# Altium PCB Node_Hub.PcbDoc
Units mil, origin at the board's own origin, x right, y up, seen from the top; angles counter-clockwise.
Board outline 4280 x 4715 mil, 2 copper layers (Top Layer, Bottom Layer); 17 components, 14 nets, 127 pads, 0 vias.
Unrouted connection lines stored in the file: 1.
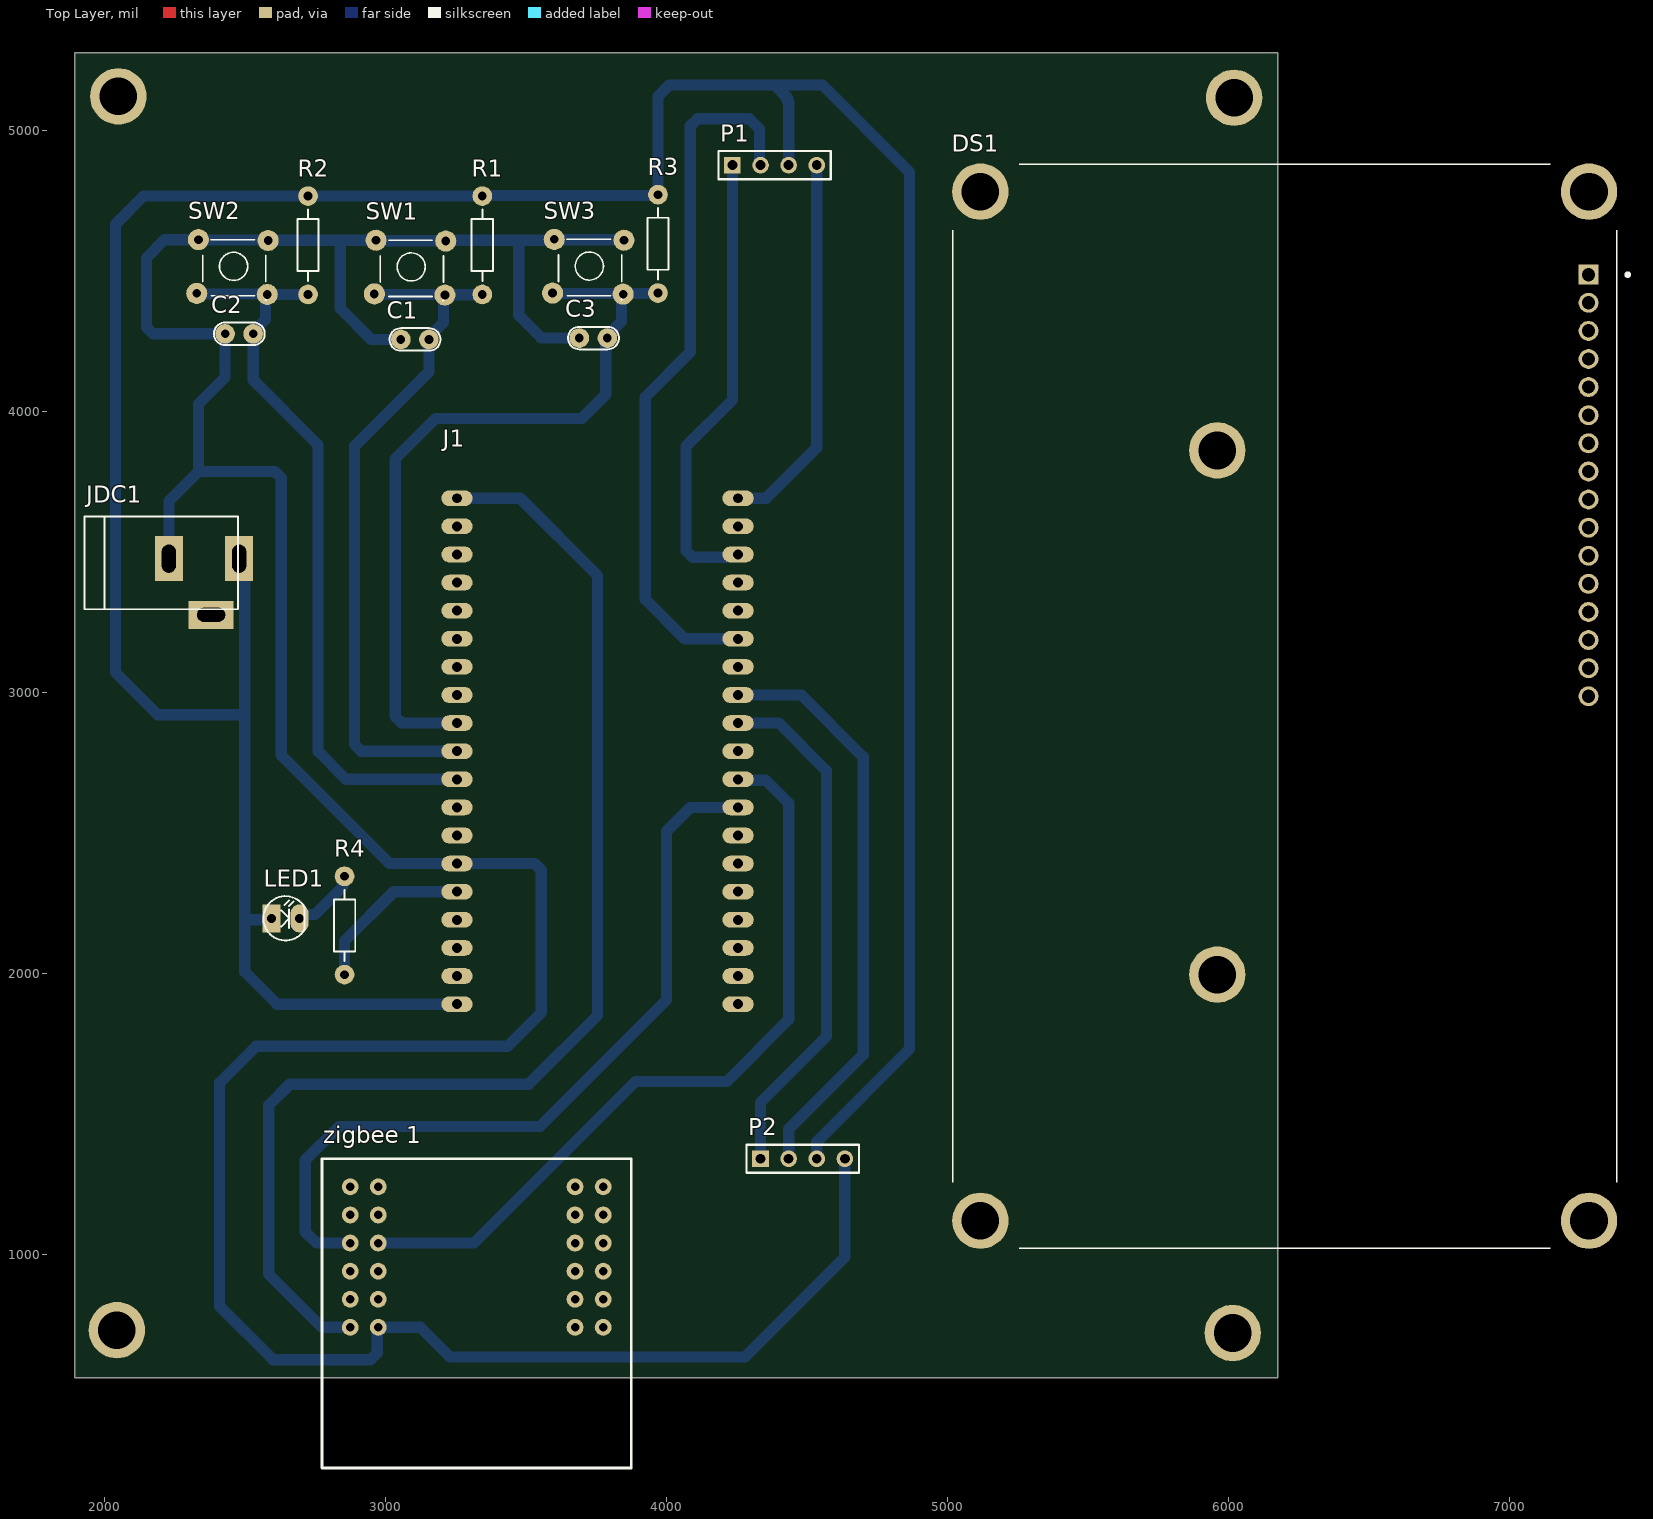
[diagram p0: Top Layer view]
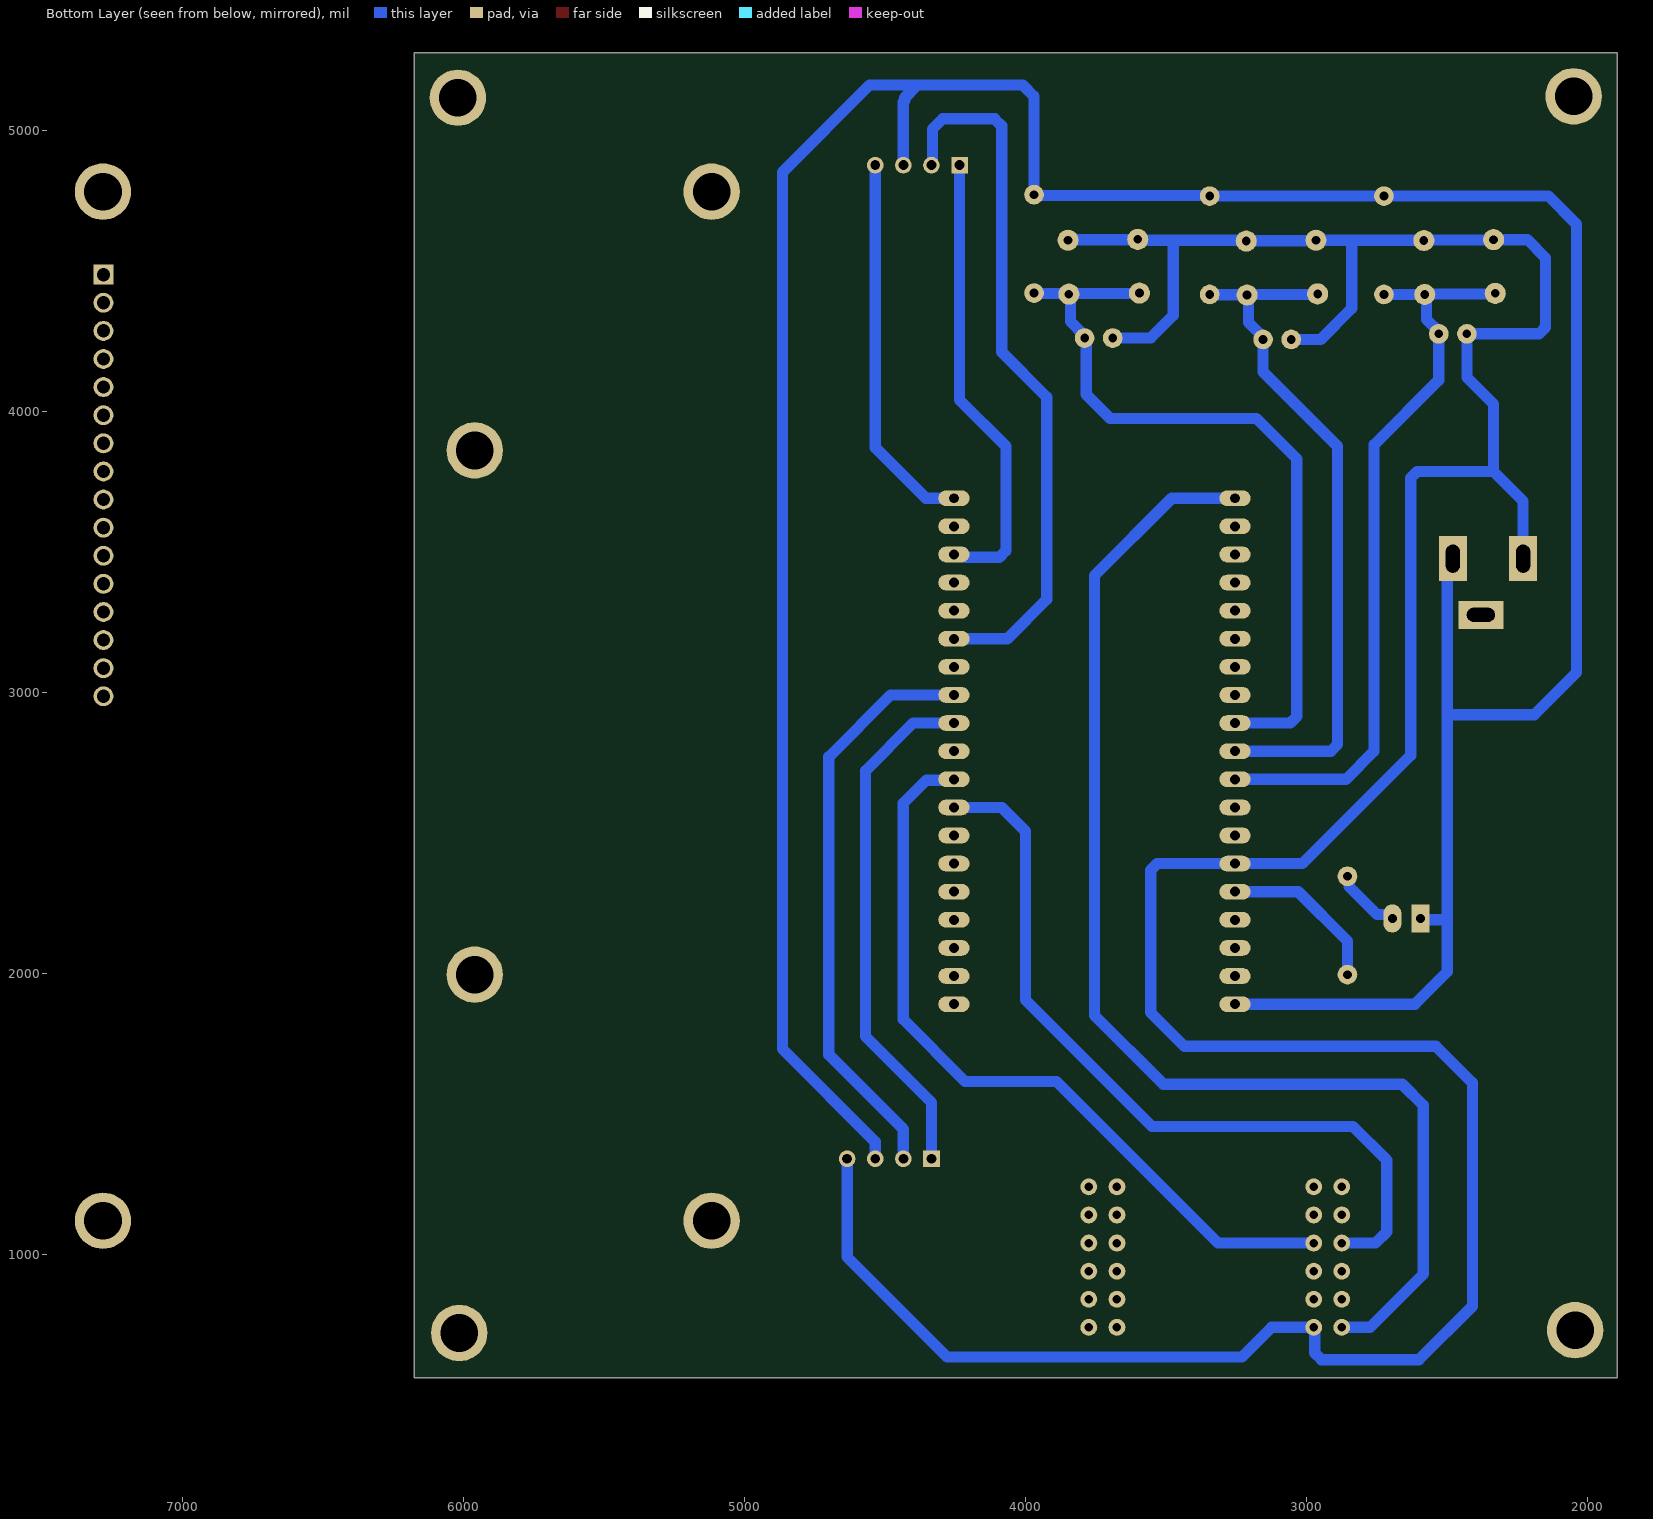
[diagram p1: Bottom Layer view, seen from below]
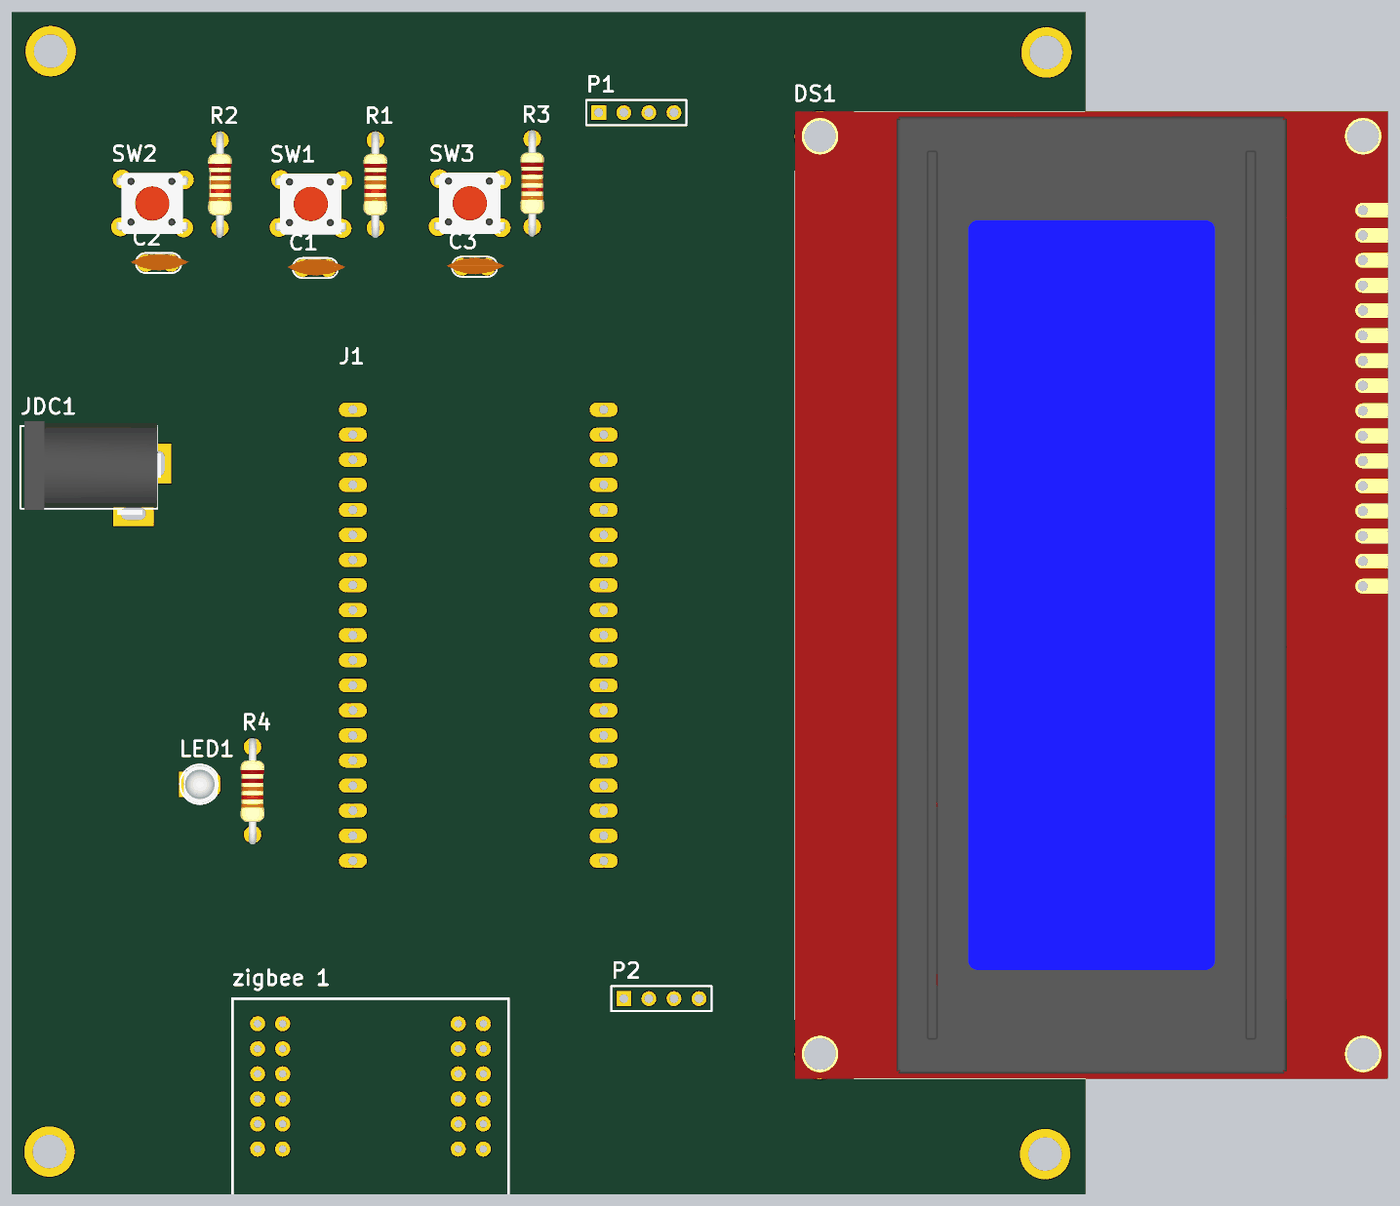
[diagram p2: 3D render of the assembled board from above, using the file's embedded part models]

## Layer stack, top to bottom
Top Solder: solder mask 0.4, Solder Resist, Dk 3.5
Top Layer: signal copper 1.4
Dielectric 1: dielectric 12.6, FR-4, Dk 4.8
Bottom Layer: signal copper 1.4
Bottom Solder: solder mask 0.4, Solder Resist, Dk 3.5

## Board outline
1895,560 6175,560 6175,5275 1895,5275

## Design rules (kind name [scope] priority, off if disabled: settings)
Clearance [All] p1: gap=20 ignorepadtopadclearanceinfootprint=FALSE
PolygonConnect [All] p1: connectstyle=Relief reliefconductorwidth=10 reliefentries=4 polygonreliefangle="90 Angle" airgapwidth=10
RoutingVias [All] p1: holewidth=28 width=50 viastyle="Through Hole" minholewidth=28 minwidth=50 maxholewidth=28 maxwidth=50
SolderMaskExpansion [All] p1: expansion=4 istentingtop=FALSE
Width [All] p1: maxlimit=100 minlimit=40 preferedwidth=80
30 further rules are at their usual default settings.

## Components (designator, comment, footprint, x,y, rotation, side; value= is the part's Value field where it differs from the comment)
C1 "100nF" CN1 3055,4255 r0 top value=33pF
C2 "100nF" CN1 2430,4275 r0 top value=33pF
C3 "100nF" CN1 3690,4260 r0 top value=33pF
DS1 "LCD-20X4B" LCD_LCD-20X4B 6200,2950 r270 top
J1 "NODEMCU32S" NODEMCU32S 3805,2840 r0 top
JDC1 "Jac DC" DC-IN 2355,3375 r0 top
LED1 "LED" LED-3 2595,2195 r0 top value="LED 3 ly Single Colour"
P1 "*Header" HDR1X4 4235,4875 r0 top
P2 "*Header" HDR1X4 4335,1340 r0 top
R1 "10k" R1/4W 3345,4415 r90 top value="R1/4W - 1K"
R2 "10k" R1/4W 2725,4415 r90 top value="R1/4W - 1K"
R3 "10k" R1/4W 3970,4420 r90 top value="R1/4W - 1K"
R4 "1k" R1/4W 2855,1995 r90 top value="R1/4W - 1K"
SW1 "SW" SW4 2967,4608 r0 top value="Button chip 4 pin"
SW2 "SW" SW4 2335,4610 r0 top value="Button chip 4 pin"
SW3 "SW" SW4 3601,4611 r0 top value="Button chip 4 pin"
"zigbee 1" "zigbee_esp" zigbee 2875,740 r90 top

## Footprints (in the part's own frame and the unit in brackets; to place one, negate y for a bottom-side part, rotate by r counter-clockwise, add the part's x,y. Pads: shape width x height; smd on the part's side, far side on the other; paste and mask are expansions set on the pad)
CN1 [mil]
  round 70 hole 31: 1(0,0) 2(100,0)
  silkscreen extent -40,-40 141,40, body extent -60,-30 170,37, height 265
DC-IN [mil] "Jac DC input"
  rect 100x160 hole 50 slot 100 at 90 deg: 1(125,100) 2(-125,100)
  rect 160x100 hole 50 slot 100 at 0 deg: 3(25,-100)
  silkscreen extent -425,-80 120,250, body extent -410,-105 134,269, height 434
HDR1X4 [mm] "Connector; Header; 4 Position"
  rect 1.5x1.5 hole 0.9: 1(0,0)
  round 1.5 hole 0.9: 2(2.54,0) 3(5.08,0) 4(7.62,0)
  silkscreen extent -1.27,-1.27 8.89,1.27, body extent -1.27,-1.27 8.89,1.27, height 7
LCD_LCD-20X4B [mm]
  rect 1.8x1.8 / inner round 1.8 / far side rect 1.8x1.8 hole 1.2: 1(-39,27.46)
  round 1.8 hole 1.2: 2(-36.46,27.46) 3(-33.92,27.46) 4(-31.38,27.46) 5(-28.84,27.46) 6(-26.3,27.46) 7(-23.76,27.46) 8(-21.22,27.46) 9(-18.68,27.46) 10(-16.14,27.46) 11(-13.6,27.46) 12(-11.06,27.46) 13(-8.52,27.46) 14(-5.98,27.46) 15(-3.44,27.46) 16(-0.9,27.46)
  round 5.1 hole 3.4: S1(-46.5,27.5) S2(46.5,27.5) S3(-46.5,-27.5) S4(46.5,-27.5)
  silkscreen extent -49,-30 49,31.15, body extent -49,-30 49,30, height 11.5
LED-3 [mil] "LED 2 PIN, 3ly Only colour"
  rect 65x100 hole 32: 1(0,0)
  oval 65x100 hole 32: 2(100,0)
  silkscreen extent -29,-78 118,79, body extent -13,-75 125,75, height 217
NODEMCU32S [mil]
  oval 112x56 hole 35.43: 3V3(-550,850) EN(-550,750) GND@1(-550,-450) GND@2(450,850) GND@3(450,250) GPIO0(450,-450) GPIO2(450,-550) GPIO4(450,-350) GPIO5(450,-50) GPIO6(450,-950) GPIO7(450,-850) GPIO8(450,-750) GPIO9(-550,-650) GPIO10(-550,-750) GPIO11(-550,-850) GPIO12(-550,-350) GPIO13(-550,-550) GPIO14(-550,-250) GPIO15(450,-650) GPIO16(450,-250) GPIO17(450,-150) GPIO18(450,50) GPIO19(450,150) GPIO21(450,350) GPIO22(450,650) GPIO23(450,750) GPIO25(-550,50) GPIO26(-550,-50) GPIO27(-550,-150) GPIO32(-550,250) GPIO33(-550,150) GPIO34(-550,450) GPIO35(-550,350) GPIO36(-550,650) GPIO39(-550,550) RX0(450,450) TX0(450,550) VIN(-550,-950)
R1/4W [mil] "R 1/4W, 2 Pin, 350mil"
  round 70 hole 31: 1(0,0) 2(350,0)
  silkscreen extent 48,-38 302,38, body extent -40,-47 386,47, height 111
SW4 [mil] "SW button 4pin, 250 x250 mil"
  round 75 hole 31: 1(0,0) 2(245,-195) 3(248,-3) 4(-6,-191)
  silkscreen extent 15,-215 240,0, body extent -36,-220 276,24, height 276
zigbee [mil]
  round 60 hole 30: 1(500,0) 2(400,0) 3(300,0) 4(200,0) 5(100,0) 6(0,0) 7(0,-100) 8(100,-100) 9(200,-100) 10(300,-100) 11(400,-100) 12(500,-100) 13(500,-800) 14(400,-800) 15(300,-800) 16(200,-800) 17(100,-800) 18(0,-800) 19(0,-900) 20(100,-900) 21(200,-900) 22(300,-900) 23(400,-900) 24(500,-900)
  silkscreen extent -500,-1000 600,100

## Part data
C1 C2 C3: library part CN0, "Cremic For Xtal 1pF => 100pF"
DS1: "Display Development Tools 20X4 CHARACTER BLUE LCD W/BACKLIGHT", Package=None, Availability="In Stock", Check_prices=https://www.snapeda.com/parts/LCD-20X4B/Gravitech/view-part/?ref=eda, MF=Gravitech, MP=LCD-20X4B, Price=None, Purchase-URL=https://pricing.snapeda.com/search/part/LCD-20X4B/?ref=eda, SnapEDA_Link=https://www.snapeda.com/parts/LCD-20X4B/Gravitech/view-part/?ref=snap
J1: "WIFI MODULE V1", Package=Package, Availability="Not in stock", Check_prices=https://www.snapeda.com/parts/NODEMCU-32S/AI-Thinker/view-part/?ref=eda, MF=AI-Thinker, MP=NODEMCU-32S, Price=None, SnapEDA_Link=https://www.snapeda.com/parts/NODEMCU-32S/AI-Thinker/view-part/?ref=snap
JDC1: library part DCIN, "Jac DC input"
LED1: "LED Single colour Green and Red"
P1 P2: library part "Header 4", "Header, 4-Pin, Right Angle", LatestRevisionDate=17-Jul-2002, LatestRevisionNote="Re-released for DXP Platform.", Publisher="Altium Limited"
R1 R2 R3 R4: library part R1/4W, "Resistor 1/4W"
SW1 SW2 SW3: library part SW4, "Switch button 4 pin"

## Free pads (board coordinates)
  round 200.79 hole 133.86: 2(2045,730) 2(2050,5120) 2(5960,1995) 2(5960,3860) 3(6015,720) 4(6020,5115)

## Nets (pads, with @x,y where several pads share a name; then routed paths per layer and width w, separated by ;. In a path a pad name is that pad's centre, name@x,y a point inside that pad or via, vN(x,y) a via of type N, cw(c..) or ccw(c..) an arc to the next point about the centre after c; other vN are vias at no path point)
CHON: C1.2 J1.GPIO26 R1.1 SW1.2 SW1.4 | length 2494.1
  Bottom Layer w40: SW1.4 2963,4415 3210,4415 SW1.2 ; J1.GPIO26 2913.43,2790 2890,2813.43 2890,3875 3155,4140 C1.2 3155,4263.12 3207.38,4315.5 3207.38,4408.38 SW1.2 ; R1.1 3344,4414 3213,4414 SW1.2
GND: "zigbee 1.7" C1.1 C2.1 C3.1 J1.GND@1 J1.GND@2 JDC1.2 P1.4 P2.4 SW1.1 SW1.3 SW2.1 SW2.3 SW3.1 SW3.3 | length 13409.3
  Bottom Layer w40: JDC1.2 2230,3680 2335,3785 ; C1.1 2950,4255 2840,4365 2840,4607.5 ; C3.1 3555,4260 3475,4340 3475,4608 ; SW3.3 3847.5,4609.5 3602.5,4609.5 SW3.1 3598,4608 3475,4608 ; 4255,3690 4355,3690 4535,3870 P1.4 ; P2.4 4635,990 4280,635 3230,635 3125,740 2975,740 2971.17,736.17 2971.17,648.43 2947.74,625 2600,625 2410,815 2410,1610 2540,1740 3435,1740 3555,1860 3555,2366.57 3531.57,2390 3255,2390 3015,2390 2630,2775 2630,3761.57 2606.57,3785 2335,3785 ; 2335,3785 2335,4025 2430,4120 C2.1 2173.43,4275 2150,4298.43 2150,4545 2215,4610 SW2.1 2336.5,4608.5 2581.5,4608.5 SW2.3 2583.5,4607.5 2840,4607.5 ; 2840,4607.5 2966.5,4607.5 SW1.1 2968.5,4606.5 3213.5,4606.5 SW1.3 3218,4608 3475,4608
LED: J1.GPIO13 R4.1 | length 592.5
  Bottom Layer w40: R4.1 2855,2115 3030,2290 J1.GPIO13
LEN: C3.2 J1.GPIO25 R3.1 SW3.2 SW3.4 | length 2751.1
  Bottom Layer w40: J1.GPIO25 3058.43,2890 3035,2913.43 3035,3830 3178.93,3973.93 3698.93,3973.93 3784.26,4059.26 3784.26,4254.26 C3.2 3790,4268.12 3840.38,4318.5 3840.38,4410.38 SW3.2 ; SW3.4 3597,4418 3844,4418 SW3.2 ; R3.1 3968,4418 3848,4418 SW3.2
NetLED1_2: LED1.2 R4.2 | length 241.2
  Bottom Layer w40: LED1.2 2695,2197.61 2706.55,2209.16 2749.16,2209.16 2849.26,2309.26 2849.26,2339.26 R4.2
RX: "zigbee 1.10" J1.GPIO17 | length 2774.5
  Bottom Layer w40: 2975,1040 3315,1040 3890,1615 4215,1615 4435,1835 4435,2605 4353.06,2686.94 4258.06,2686.94 J1.GPIO17
SCL: J1.GPIO22 P1.1 | length 1638.8
  Bottom Layer w40: P1.1 4235,4040 4070,3875 4070,3503.43 4093.43,3480 4212.67,3480 4222.67,3490 J1.GPIO22
SCL2: J1.GPIO18 P2.1 | length 1862.8
  Bottom Layer w40: J1.GPIO18 4400,2890 4570,2720 4570,1775 4335,1540 P2.1
SDA: J1.GPIO21 P1.2 | length 2541.2
  Bottom Layer w40: J1.GPIO21 4065,3190 3925,3330 3925,4050 4085,4210 4085,5015 4110,5040 4295,5040 4331.35,5003.65 4331.35,4878.65 P1.2
SDA2: J1.GPIO19 P2.2 | length 2075.9
  Bottom Layer w40: J1.GPIO19 4480,2990 4700,2770 4700,1710 4435,1445 P2.2
TX: "zigbee 1.3" J1.GPIO16 | length 2842.9
  Bottom Layer w40: 2875,1040 2755,1040 2715,1080 2715,1335 2835,1455 3550,1455 4000,1905 4000,2505 4085,2590 J1.GPIO16
VCC: J1.VIN JDC1.1 LED1.1 P1.3 P2.3 R1.2 R2.2 R3.2 | length 11811
  Bottom Layer w40: JDC1.1 2500,3455 2500,2920 ; LED1.1 2590,2190 2500,2190 ; J1.VIN 2615,1890 2500,2005 2500,2190 ; P1.3 4435,5100 4430,5105 4430,5115 4385,5160 ; P2.3 4535,1400 4865,1730 4865,4850 4555,5160 4385,5160 ; 2500,2190 2500,2920 ; 2500,2920 2190,2920 2040,3070 2040,4665 2140,4765 R2.2 R1.2 3347.5,4767.5 3967.5,4767.5 R3.2 3970,5120 4010,5160 4385,5160
VCC3V3: "zigbee 1.6" J1.3V3 | length 4450.2
  Bottom Layer w40: 2875,740 2775,740 2585,930 2585,1530 2660,1605 3510,1605 3755,1850 3755,3415 3480,3690 J1.3V3
XUONG: C2.2 J1.GPIO27 R2.1 SW2.2 SW2.4 | length 2675.1
  Bottom Layer w40: SW2.4 2331,4417 2578,4417 SW2.2 ; R2.1 SW2.2 ; J1.GPIO27 2860,2690 2760,2790 2760,3880 2530,4110 C2.2 2530,4283.12 2573.3,4326.42 2573.3,4408.3 SW2.2
pads on no net: "zigbee 1.1" "zigbee 1.2" "zigbee 1.4" "zigbee 1.5" "zigbee 1.8" "zigbee 1.9" "zigbee 1.11" "zigbee 1.12" "zigbee 1.13" "zigbee 1.14" "zigbee 1.15" "zigbee 1.16" "zigbee 1.17" "zigbee 1.18" "zigbee 1.19" "zigbee 1.20" "zigbee 1.21" "zigbee 1.22" "zigbee 1.23" "zigbee 1.24" DS1.1 DS1.2 DS1.3 DS1.4 DS1.5 DS1.6 DS1.7 DS1.8 DS1.9 DS1.10 DS1.11 DS1.12 DS1.13 DS1.14 DS1.15 DS1.16 DS1.S1 DS1.S2 DS1.S3 DS1.S4 J1.EN J1.GND@3 J1.GPIO0 J1.GPIO2 J1.GPIO4 J1.GPIO5 J1.GPIO6 J1.GPIO7 J1.GPIO8 J1.GPIO9 J1.GPIO10 J1.GPIO11 J1.GPIO12 J1.GPIO14 J1.GPIO15 J1.GPIO23 J1.GPIO32 J1.GPIO33 J1.GPIO34 J1.GPIO35 J1.GPIO36 J1.GPIO39 J1.RX0 J1.TX0 JDC1.3

## Text inside footprints (layer, text, board x,y; h text height)
J1: Mechanical 13 "EN" at 3330,3590 h32; Mechanical 13 "D36" at 3330,3490 h32; Mechanical 13 "D39" at 3330,3390 h32; Mechanical 13 "D34" at 3330,3290 h32; Mechanical 13 "D35" at 3330,3190 h32; Mechanical 13 "D32" at 3330,3090 h32; Mechanical 13 "D33" at 3330,2990 h32; Mechanical 13 "D25" at 3330,2890 h32; Mechanical 13 "D26" at 3330,2790 h32; Mechanical 13 "D27" at 3330,2690 h32; Mechanical 13 "D14" at 3330,2590 h32; Mechanical 13 "D12" at 3330,2490 h32; Mechanical 13 "D13" at 3330,2290 h32; Mechanical 13 "GND" at 3330,2390 h32; Mechanical 13 "VIN" at 3330,1890 h32; Mechanical 13 "D15" at 4180,2190 h32; Mechanical 13 "D2" at 4180,2290 h32; Mechanical 13 "D0" at 4180,2390 h32; Mechanical 13 "D4" at 4180,2490 h32; Mechanical 13 "D16" at 4180,2590 h32; Mechanical 13 "D17" at 4180,2690 h32; Mechanical 13 "D5" at 4180,2790 h32; Mechanical 13 "D18" at 4180,2890 h32; Mechanical 13 "D19" at 4180,2990 h32; Mechanical 13 "D21" at 4180,3190 h32; Mechanical 13 "RX0" at 4180,3290 h32; Mechanical 13 "TX0" at 4180,3390 h32; Mechanical 13 "D22" at 4180,3490 h32; Mechanical 13 "D23" at 4180,3590 h32; Mechanical 13 "3V3" at 3330,3690 h32; Mechanical 13 "D9" at 3330,2190 h32; Mechanical 13 "D10" at 3330,2090 h32; Mechanical 13 "D11" at 3330,1990 h32; Mechanical 13 "GND" at 4180,3690 h32; Mechanical 13 "GND" at 4180,3090 h32; Mechanical 13 "D8" at 4180,2090 h32; Mechanical 13 "D7" at 4180,1990 h32; Mechanical 13 "D6" at 4180,1890 h32